# Altium PCB Control Board.pcbdoc
Units mil, origin at the board's own origin, x right, y up, seen from the top; angles counter-clockwise.
Board outline 3543.31 x 2755.91 mil, 2 copper layers (Top Layer, Bottom Layer), stack 62.206 mil thick; 13 components, 43 nets, 106 pads, 132 vias.
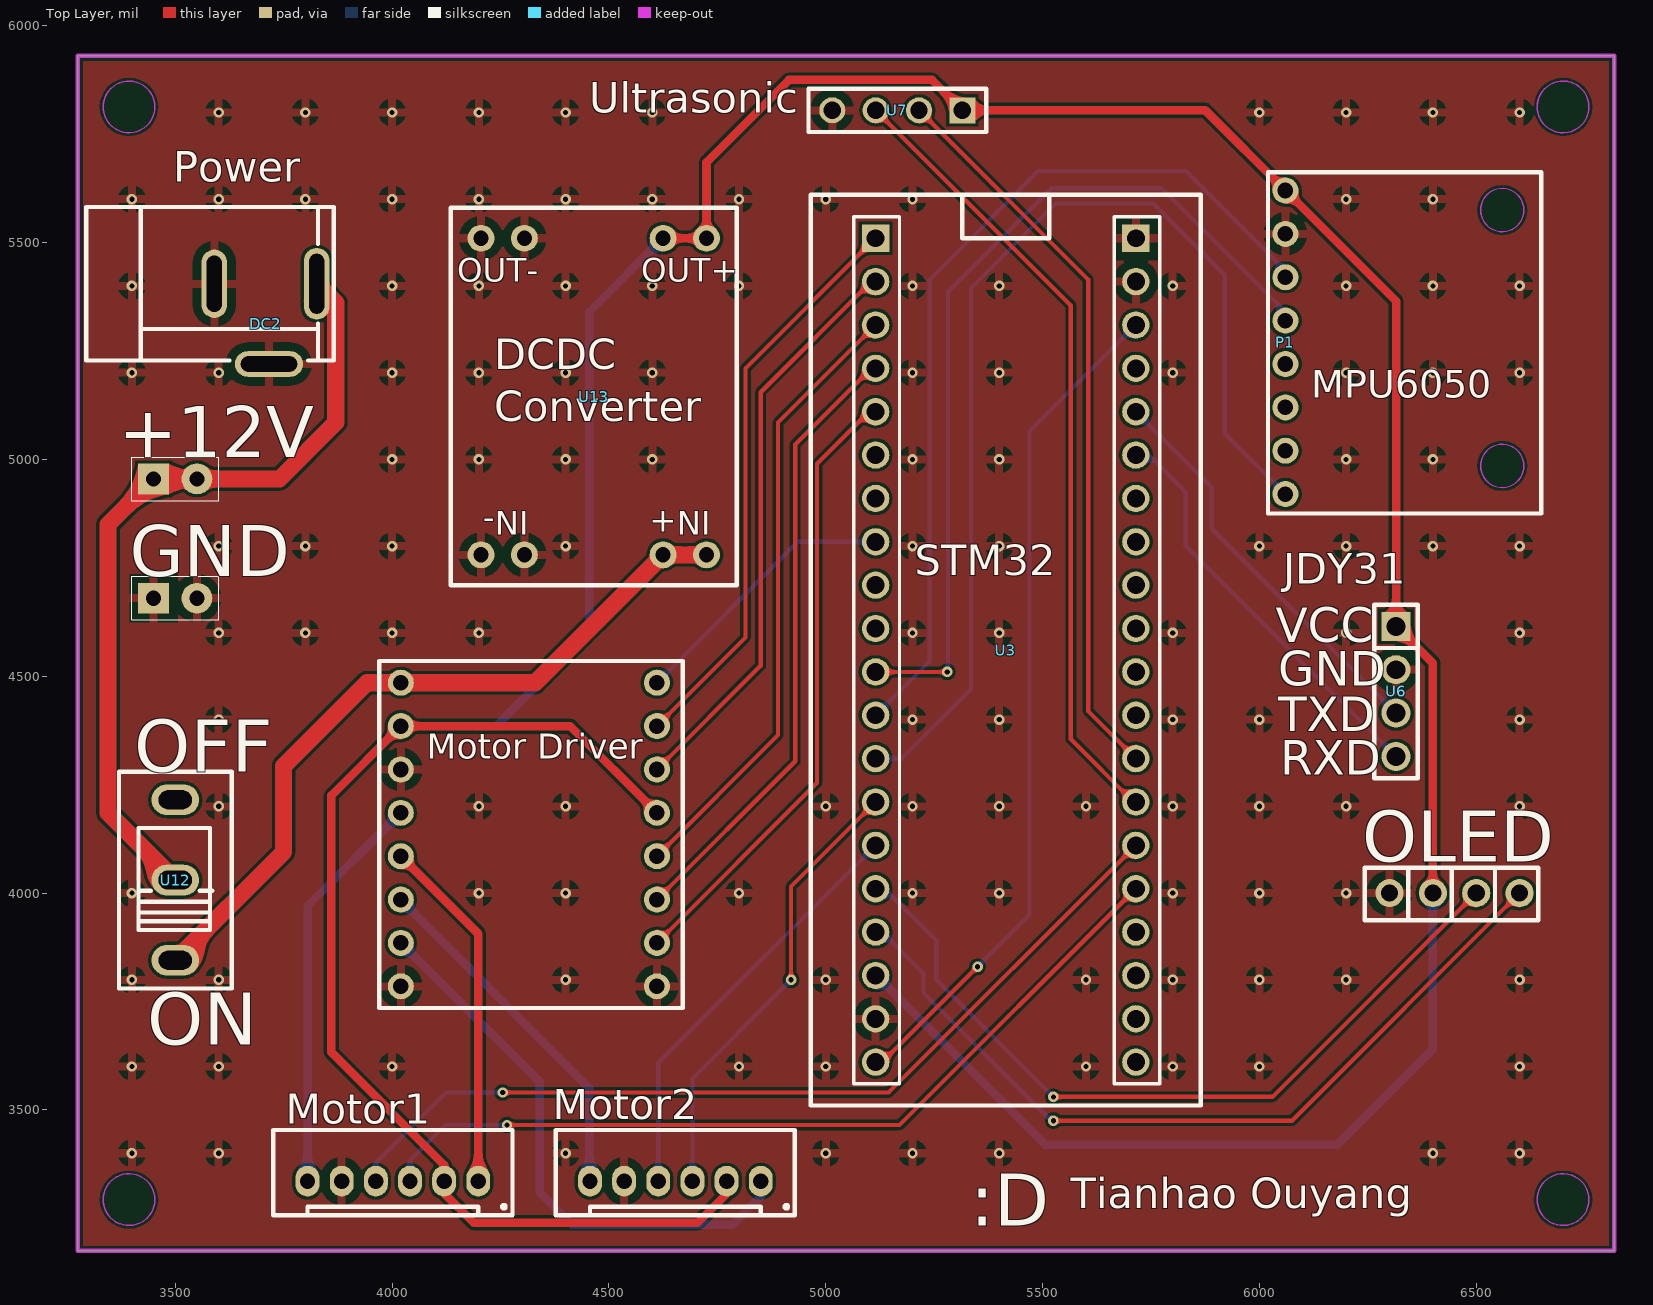
[diagram p0: Top Layer view]
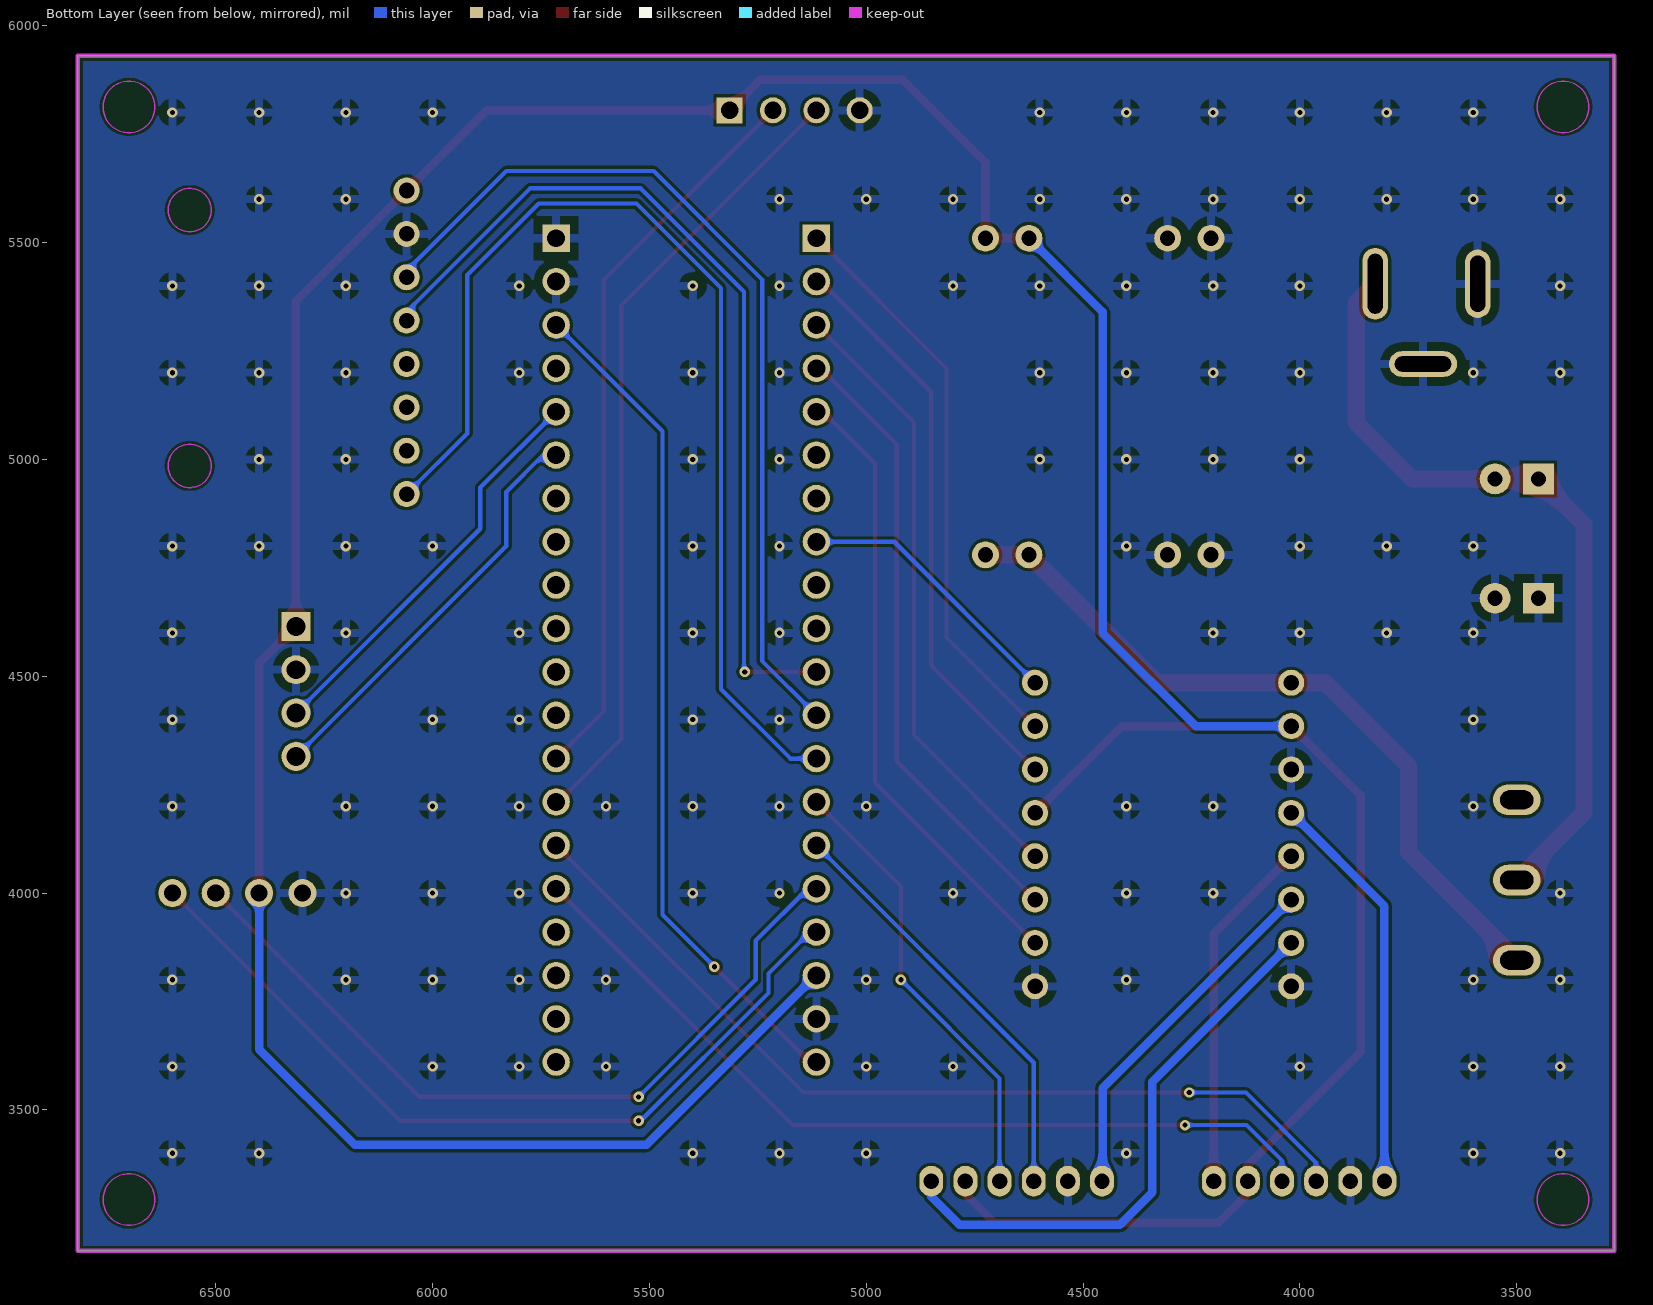
[diagram p1: Bottom Layer view, seen from below]

## Layer stack, top to bottom
Top Solder Mask Layer: solder mask 0.394, Dk 3.3
Top Layer: signal copper 1.379
Dielectric1: surface 59.449, FR4, Dk 4.5
Bottom Layer: signal copper 1.378
Bottom Solder Mask Layer: solder mask 0.394, Dk 3.3

## Board outline
3275,3175 3275,5930.91 6818.31,5930.91 6818.31,3175

## Design rules (kind name [scope] priority, off if disabled: settings)
BoardOutlineClearance Plane_innerPlane_1 [All] p1: gap=10 ignorepadtopadclearanceinfootprint=FALSE except(0: Arc-SplitContinuation Track-SplitContinuation SMDPad-SplitContinuation THPad-SplitContinuation Via-SplitContinuation Fill-SplitContinuation Poly-SplitContinuation Region-SplitContinuation Text-SplitContinuation)
BoardOutlineClearance safeClearance_1 [All] p2: gap=10 ignorepadtopadclearanceinfootprint=FALSE except(0: Arc-SplitContinuation Track-SplitContinuation SMDPad-SplitContinuation THPad-SplitContinuation Via-SplitContinuation Fill-SplitContinuation Poly-SplitContinuation Region-SplitContinuation Text-SplitContinuation)
BoardOutlineClearance otherClearance_1 [All] p3: gap=10 ignorepadtopadclearanceinfootprint=FALSE except(0: Arc-SplitContinuation Track-SplitContinuation SMDPad-SplitContinuation THPad-SplitContinuation Via-SplitContinuation Fill-SplitContinuation Poly-SplitContinuation Region-SplitContinuation Text-SplitContinuation)
BoardOutlineClearance Copper_copperRegion_1 [All] p4: gap=10 ignorepadtopadclearanceinfootprint=FALSE except(0: Arc-SplitContinuation Track-SplitContinuation SMDPad-SplitContinuation THPad-SplitContinuation Via-SplitContinuation Fill-SplitContinuation Poly-SplitContinuation Region-SplitContinuation Text-SplitContinuation)
Clearance Plane_innerPlane [All] p1: gap=7 ignorepadtopadclearanceinfootprint=FALSE
Clearance safeClearance [All] p2: gap=7 ignorepadtopadclearanceinfootprint=FALSE
Clearance otherClearance [All] p3: gap=7 ignorepadtopadclearanceinfootprint=FALSE
Clearance Copper_copperRegion [All] p4: gap=7 ignorepadtopadclearanceinfootprint=FALSE
DiffPairsRouting differentialPair [All] p1: maxlimit=5.98 minlimit=5.98 mostfreqgap=5.98 toplayer_minwidth=5 toplayer_maxwidth=100 toplayer_prefwidth=10 bottomlayer_minwidth=5 bottomlayer_maxwidth=100 bottomlayer_prefwidth=10 maxuncoupledlength=10
PasteMaskExpansion pasteMaskExpansion [All] p1: expansion=0
PlaneConnect innerPlane [All] p1: planeconnectstyle=Relief reliefexpansion=20 reliefentries=4 reliefconductorwidth=10 reliefairgap=10
PolygonConnect copperRegion [All] p1: connectstyle=Relief reliefconductorwidth=19.68 reliefentries=4 polygonreliefangle="90 Angle" airgapwidth=19.68
RoutingVias viaSize [All] p1: holewidth=12.01 width=12.01 viastyle="Through Hole" minholewidth=11.81 minwidth=11.81 maxholewidth=236.22 maxwidth=236.22
SolderMaskExpansion solderMaskExpansion [All] p1: expansion=4.02 istentingtop=FALSE useseparateexpansions=TRUE expansionbottom=4.02 istentingbottom=FALSE
Width trackWidth [All] p1: maxlimit=100 minlimit=5 preferedwidth=10
27 further rules are at their usual default settings.

## Components (designator, comment, footprint, x,y, rotation, side; value= is the part's Value field where it differs from the comment)
+12V "Comment" ?#1 3500,4955 r0 top
DC2 "Comment" ?#2 3708.1,5312.5 r0 top
GND "Comment" ?#1 3500,4680 r0 top
Motor1 "Comment" ?#3 4198.7,3335.63 r180 top
Motor2 "Comment" ?#3 4850,3335.63 r180 top
"Motor Driver" "Comment" ?#4 4320,4135 r0 top
OLED "Comment" ?#5 6450,4000 r0 top
P1 "Comment" ?#6 6020,4875 r0 top
U3 "Comment" ?#7 5415,4560 r0 top
U6 "Comment" ?#8 6315,4465 r180 top
U7 "Comment" ?#9 5315,5805 r180 top
U12 "Comment" SW-TH_SS-12D10-G050 3500,4030 r90 top
U13 "Comment" ?#10 4465,5145 r90 top

## Footprints (in the part's own frame and the unit in brackets; to place one, negate y for a bottom-side part, rotate by r counter-clockwise, add the part's x,y. Pads: shape width x height; smd on the part's side, far side on the other; paste and mask are expansions set on the pad)
SW-TH_SS-12D10-G050 [mm]
  oval 1.8x2.8 hole 1.1 slot 1.95 at 90 deg paste-2539.97 mask+0.05: 1(-4.7,0) 2(0,0) 3(4.7,0)
  silkscreen extent -6.35,-3.3 6.35,3.3
?#1 [mil]
  rect 70.9x70.9 hole 35 paste-99999 mask+2: 1(-50,0)
  round 70.9 hole 35 paste-99999 mask+2: 2(50,0)
  silkscreen extent -100,-50 100,50
?#2 [mil]
  oval 59.1x165.4 hole 35.4 slot 137.8 at 90 deg paste-99999 mask+1.97: 1(118.1,92.5)
  oval 59.1x157.5 hole 35.4 slot 129.9 at 90 deg paste-99999 mask+1.97: 2(-118.1,92.5)
  oval 157.5x59.1 hole 35.4 slot 129.9 at 0 deg paste-99999 mask+1.97: 3(7.9,-92.5)
  silkscreen extent -413,-85 158,270
?#3 [mil]
  oval 55.12x70.87 hole 35.43 paste-99999 mask+2: 1(0,0.01) 2(78.74,0.01) 3(157.48,0.01) 4(236.22,0.01) 5(314.96,0.01) 6(393.7,0.01)
  silkscreen extent -79,-118 472,79
?#4 [mil]
  round 60 hole 36 paste-99999: 1(-300,350) 2(-300,250) 3(-300,150) 4(-300,50) 5(-300,-50) 6(-300,-150) 7(-300,-250) 8(-300,-350) 9(290.55,-350) 10(290.55,-250) 11(290.55,-150) 12(290.55,-50) 13(290.55,50) 14(290.55,150) 15(290.55,250) 16(290.55,350)
  silkscreen extent -350,-400 350,400
?#5 [mil]
  round 65 hole 39.4 paste-99999 mask+2: 1(-150,0) 2(-50,0.1) 3(50,0.1) 4(150,0.1)
  silkscreen extent -207,-63 193,58
?#6 [mil]
  round 60 hole 36 paste-99999 mask+2: 1(40,745) 2(40,645) 3(40,545) 4(40,445) 5(40,345) 6(40,245) 7(40,145) 8(40,45)
  Board Outline Layer circle w0.1: c540,700 r50
  Board Outline Layer circle w0.1: c540,110 r50
  Board Outline Layer region: 590,700 585.05,678.31 571.17,660.91 551.13,651.25 528.87,651.25 508.83,660.91 494.95,678.31 490,700 490,700 494.95,721.69 508.83,739.09 528.87,748.75 551.13,748.75 571.17,739.09 585.05,721.69 590,700 590,700
  Board Outline Layer region: 590,700 585.05,678.31 571.17,660.91 551.13,651.25 528.87,651.25 508.83,660.91 494.95,678.31 490,700 490,700 494.95,721.69 508.83,739.09 528.87,748.75 551.13,748.75 571.17,739.09 585.05,721.69 590,700 590,700
  Board Outline Layer region: 590,110 585.05,88.31 571.17,70.91 551.13,61.25 528.87,61.25 508.83,70.91 494.95,88.31 490,110 490,110 494.95,131.69 508.83,149.09 528.87,158.75 551.13,158.75 571.17,149.09 585.05,131.69 590,110 590,110
  Board Outline Layer region: 590,110 585.05,88.31 571.17,70.91 551.13,61.25 528.87,61.25 508.83,70.91 494.95,88.31 490,110 490,110 494.95,131.69 508.83,149.09 528.87,158.75 551.13,158.75 571.17,149.09 585.05,131.69 590,110 590,110
  silkscreen extent 0,0 630,787
?#7 [mil]
  rect 63x63 hole 41.3 paste-99999 mask+4: 1(-300,950) 40(300,950)
  round 63 hole 41.3 paste-99999 mask+4: 2(-300,850) 3(-300,750) 4(-300,650) 5(-300,550) 6(-300,450) 7(-300,350) 8(-300,250) 9(-300,150) 10(-300,50) 11(-300,-50) 12(-300,-150) 13(-300,-250) 14(-300,-350) 15(-300,-450) 16(-300,-550) 17(-300,-650) 18(-300,-750) 19(-300,-850) 20(-300,-950) 21(300,-950) 22(300,-850) 23(300,-750) 24(300,-650) 25(300,-550) 26(300,-450) 27(300,-350) 28(300,-250) 29(300,-150) 30(300,-50) 31(300,50) 32(300,150) 33(300,250) 34(300,350) 35(300,450) 36(300,550) 37(300,650) 38(300,750) 39(300,850)
  silkscreen extent -450,-1050 450,1050
?#8 [mil]
  rect 66.9x66.9 hole 43.3 paste-99999 mask+4: 1(0,-150)
  round 66.9 hole 43.3 paste-99999 mask+4: 2(0,-50) 3(0,50) 4(0,150)
  silkscreen extent -50,-200 50,200
?#9 [mil]
  rect 60x60 hole 40.16 paste-99999: 1(0,0)
  round 60 hole 40.16 paste-99999: 2(100,0) 3(200,0) 4(300,0)
  silkscreen extent -55,-50 355,50
?#10 [mil]
  round 62.01 hole 35 paste-99999 mask+4: 1(-365,-260) 1(-365,-160) 2(-365,160) 2(-365,260) 3(365,-260) 3(365,-160) 4(365,160) 4(365,260)
  silkscreen extent -435,-330 435,330

## Via types
v1: diameter 24.02, hole 11.97, Top Layer to Bottom Layer, 125 vias
v2: diameter 24.02, hole 12.01, Top Layer to Bottom Layer, 7 vias

## Nets (pads, with @x,y where several pads share a name; then routed paths per layer and width w, separated by ;. In a path a pad name is that pad's centre, name@x,y a point inside that pad or via, vN(x,y) a via of type N, cw(c..) or ccw(c..) an arc to the next point about the centre after c; other vN are vias at no path point)
$3N3363: +12V.1 +12V.2 DC2.1 U12.2 | length 1844.7
  Top Layer w39.37: U12.2 3345,4185 3345,4850 +12V.1 +12V.2 3740,4955 3870,5085 3870,5361.2 DC2.1
$3N13220: U3.21
$3N13221: U3.37
+3.3V: U3.20 U3.38 | length 1957.3
  Top Layer w9.84: U3.20 5130,3610 v2(5350,3830)
  Bottom Layer w9.84: v2(5350,3830) 5470,3950 5470,5065 U3.38
+5V: "Motor Driver.2" "Motor Driver.13" Motor1.2 Motor2.2 OLED.2 P1.1 U3.18 U6.1 U7.1 U13.3 | length 9618
  Top Layer w19.68: 4610.55,4185 4410.55,4385 4020,4385 3860,4225 3860,3632.86 4119.96,3372.9 Motor1.2 4119.96,3307.79 4187.75,3240 4705,3240 4770,3305 4770,3334.36 Motor2.2 ; U13.3@4625,5510 4725,5510 4725,5685 4915,5875 5245,5875 U7.1 5875,5805 P1.1 6315,5365 U6.1 6400,4530 OLED.2
  Bottom Layer w19.68: 4020,4385 4240,4385 4455,4600 4455,5340 U13.3@4625,5510 ; U3.18 5116.31,3810 5506.31,3420 6180,3420 6400,3640 OLED.2
+12V: "Motor Driver.1" U12.1 U13.1 | length 1728.4
  Top Layer w39.37: U12.1 3750,4094.96 3750,4293.1 3941.9,4485 4020,4485 4330,4485 4625,4780 U13.1@4725,4780
AM1: "Motor Driver.5" Motor1.1 | length 823.4
  Top Layer w19.68: 4020,4085 4198.7,3906.3 Motor1.1
AM2: "Motor Driver.4" Motor1.6 | length 938.4
  Bottom Layer w19.68: Motor1.6 3805,3970 4020,4185
BM1: "Motor Driver.7" Motor2.1 | length 1311.2
  Bottom Layer w19.68: 4020,3885 4340,3565 4340,3310 4415,3235 4785,3235 4850,3300 Motor2.1
BM2: "Motor Driver.6" Motor2.6 | length 830.1
  Bottom Layer w19.68: 4020,3985 4455,3550 4455,3336.93 Motor2.6
GND: "Motor Driver.3" "Motor Driver.8" "Motor Driver.9" DC2.2 DC2.3 GND.1 GND.2 Motor1.5 Motor2.5 OLED.1 P1.2 U3.19 U3.39 U3.40 U6.2 U7.4 U13.2 U13.4
  other v1: 3400,3400 3600,3400 4400,3400 5000,3400 5200,3400 5400,3400 6400,3400 6600,3400 3400,3600 3600,3600 4000,3600 4800,3600 5000,3600 5600,3600 5800,3600 6000,3600 6600,3600 3400,3800 3600,3800 4400,3800 5000,3800 5600,3800 5800,3800 6000,3800 6200,3800 6600,3800 3400,4000 4200,4000 4400,4000 4800,4000 5200,4000 5400,4000 5800,4000 6000,4000 6200,4000 3600,4200 4200,4200 4400,4200 5000,4200 5200,4200 5400,4200 5600,4200 5800,4200 6000,4200 6200,4200 6600,4200 3600,4400 5200,4400 5400,4400 5800,4400 6000,4400 6600,4400 3600,4600 3800,4600 4000,4600 4200,4600 5200,4600 5400,4600 5800,4600 6200,4600 6600,4600 3600,4800 3800,4800 4000,4800 4400,4800 5200,4800 5400,4800 6000,4800 6200,4800 6400,4800 6600,4800 4000,5000 4200,5000 4400,5000 4600,5000 5200,5000 5400,5000 6200,5000 6400,5000 3400,5200 3600,5200 4000,5200 4200,5200 4400,5200 4600,5200 5200,5200 5400,5200 5800,5200 6200,5200 6400,5200 6600,5200 3400,5400 4000,5400 4200,5400 4400,5400 4600,5400 4800,5400 5200,5400 5400,5400 5800,5400 6200,5400 6400,5400 6600,5400 3400,5600 3600,5600 3800,5600 4000,5600 4200,5600 4400,5600 4600,5600 4800,5600 5000,5600 5200,5600 6200,5600 6400,5600 3600,5800 3800,5800 4000,5800 4200,5800 4400,5800 4600,5800 6000,5800 6200,5800 6400,5800 6600,5800
PA0: Motor1.3 U3.25 | length 1980.8
  Top Layer w9.84: v2(4265,3465) 5170,3465 U3.25
  Bottom Layer w9.84: Motor1.3 4041.22,3382.9 4123.32,3465 v2(4265,3465)
PA1: Motor1.4 U3.26 | length 2098.1
  Top Layer w9.84: v2(4255,3540) 5145,3540 U3.26
  Bottom Layer w9.84: Motor1.4 3962.48,3377.98 4124.5,3540 v2(4255,3540)
PA2: U3.27 U7.3 | length 1846.5
  Top Layer w9.84: U7.3 5565,5355 5565,4355 5710,4210 U3.27
PA3: U3.28 U7.2 | length 1702.1
  Top Layer w9.84: U7.2 5605,5415 5605,4420 U3.28
PA4: U3.29
PA5: U3.30
PA6: U3.31
PA7: U3.32
PA8: "Motor Driver.10" U3.5 | length 1442.7
  Top Layer w9.84: 4610.55,3885 4980,4254.45 4980,4990 5100,5110 U3.5
PA9: U3.6
PA10: U3.7
PA11: "Motor Driver.16" U3.8 | length 639.1
  Bottom Layer w9.84: 4610.55,4485 4935.55,4810 U3.8
PA12: U3.9
PA15: U3.10
PB0: U3.33
PB1: U3.34
PB3: P1.4 U3.11 | length 2057.5
  Top Layer w9.84: U3.11 v2(5280,4510)
  Bottom Layer w9.84: v2(5280,4510) 5281.72,4511.72 5281.72,5386.72 5520,5625 5775,5625 6060,5340 P1.4
PB4: P1.3 U3.12 | length 2090.6
  Bottom Layer w9.84: U3.12 5240,4535 5240,5415 5490,5665 5830,5665 6060,5435 P1.3
PB5: P1.8 U3.13 | length 2508.4
  Bottom Layer w9.84: U3.13 5175,4310 5335,4470 5335,5395 5530,5590 5755,5590 5920,5425 5920,5060 P1.8
PB6: Motor2.3 U3.14 | length 1049.4
  Top Layer w9.84: v2(4920,3800) 4920,4015 U3.14
  Bottom Layer w9.84: Motor2.3 4692.52,3572.52 v2(4920,3800)
PB7: Motor2.4 U3.15 | length 982
  Bottom Layer w9.84: Motor2.4 4613.78,3608.78 U3.15
PB8: OLED.3 U3.16 | length 1831.3
  Top Layer w9.84: v2(5525,3530) 6029.9,3530 OLED.3
  Bottom Layer w9.84: U3.16 5135,4010 5255,3890 5255,3800 v2(5525,3530)
PB9: OLED.4 U3.17 | length 1909
  Top Layer w9.84: v2(5525,3475) 6074.9,3475 OLED.4
  Bottom Layer w9.84: U3.17 5130,3910 5225.5,3814.5 5225.5,3769.5 5520,3475 v2(5525,3475)
PB10: U3.35 U6.4 | length 961.1
  Bottom Layer w9.84: U3.35 5745,5010 5830,4925 5830,4800 U6.4
PB11: U3.36 U6.3 | length 943.5
  Bottom Layer w9.84: U3.36 5890,4935 5890,4840 U6.3
PB12: "Motor Driver.15" U3.1 | length 1333.9
  Top Layer w9.84: 4610.55,4385 4815,4589.45 4815,5210 U3.1
PB13: "Motor Driver.14" U3.2 | length 1339.8
  Top Layer w9.84: 4610.55,4285 4850,4524.45 4850,5155 5105,5410 U3.2
PB14: "Motor Driver.12" U3.3 | length 1433.9
  Top Layer w9.84: 4610.55,4085 4890,4364.45 4890,5085 U3.3
PB15: "Motor Driver.11" U3.4 | length 1439.8
  Top Layer w9.84: 4610.55,3985 4929.5,4303.95 4929.5,5034.5 5105,5210 U3.4
PC13: U3.22
PC14: U3.23
PC15: U3.24
pads on no net: P1.5 P1.6 P1.7 U12.3

## Polygon pours and split planes (outlines as drawn)
GND on Top Layer "Top Layer-GND" (solid, remove dead copper, pour order 0): 3000,6075 7015,6075 7015,3000 3000,3000
GND on Bottom Layer "Bottom Layer-GND" (solid, remove dead copper, pour order 2): 3065,6030 6880,6030 6880,3065 3065,3065

## Keep-outs
Board Outline Layer:
  circle w0.1: c3393.11,3293.11 r59.69
  circle w0.1: c3393.11,5812.8 r59.69
  circle w0.1: c6700.2,5812.8 r59.69
  circle w0.1: c6700.2,3293.11 r59.69
  region: 3452.8,3293.11 cw(c3393.11,3293.11) 3333.43,3293.11 cw(c3393.11,3293.11) 3452.8,3293.11
  region: 3452.8,3293.11 cw(c3393.11,3293.11) 3333.43,3293.11 cw(c3393.11,3293.11) 3452.8,3293.11
  region: 3452.8,5812.8 cw(c3393.11,5812.8) 3333.43,5812.8 cw(c3393.11,5812.8) 3452.8,5812.8
  region: 3452.8,5812.8 cw(c3393.11,5812.8) 3333.43,5812.8 cw(c3393.11,5812.8) 3452.8,5812.8
  region: 6759.89,5812.8 cw(c6700.2,5812.8) 6640.52,5812.8 cw(c6700.2,5812.8) 6759.89,5812.8
  region: 6759.89,5812.8 cw(c6700.2,5812.8) 6640.52,5812.8 cw(c6700.2,5812.8) 6759.89,5812.8
  region: 6759.88,3293.11 cw(c6700.2,3293.11) 6640.51,3293.11 cw(c6700.2,3293.11) 6759.88,3293.11
  region: 6759.88,3293.11 cw(c6700.2,3293.11) 6640.51,3293.11 cw(c6700.2,3293.11) 6759.88,3293.11
  lines w10: 3275,3175 3275,5930.91 6818.31,5930.91 6818.31,3175 3275,3175

## Silkscreen, mask and mechanical layers (free items; w line width, h text height)
Top Silkscreen Layer:
  text "Ultrasonic" at 4455,5776.25 h120
  text "Power" at 3495,5617 h120
  text "MPU6050" at 6120,5120 h110.24
  text "DCDC / Converter" at 4235,5065 h120
  text "STM32" at 5205,4710 h120
  text "JDY31" at 6055,4690 h120
  text "OFF" at 3405,4280 h120
  text "ON" at 3435,3650 h120
  text "Tianhao Ouyang" at 5565,3250 h120
  text ":D" at 5332.99,3232.99 h120
Mechanical Layer:
  circle w0.1: c3393.11,3293.11 r59.69
  circle w0.1: c3393.11,5812.8 r59.69
  circle w0.1: c6700.2,5812.8 r59.69
  circle w0.1: c6700.2,3293.11 r59.69

## Text inside footprints (layer, text, board x,y; h text height)
U6: Top Silkscreen Layer "VCC" at 6038,4578 h78.74; Top Silkscreen Layer "GND" at 6043,4478 h78.74; Top Silkscreen Layer "RXD" at 6048,4273 h78.74; Top Silkscreen Layer "TXD" at 6043,4373 h78.74
U13: Top Silkscreen Layer "OUT+" at 4575,5410 h55.12; Top Silkscreen Layer "OUT-" at 4150,5410 h55.12; Top Silkscreen Layer "IN+" at 4735,4880 h55.12 r180; Top Silkscreen Layer "IN-" at 4315,4880 h55.12 r180